# Altium PCB PCB1.PcbDoc
Units mil, origin at the board's own origin, x right, y up, seen from the top; angles counter-clockwise.
Board outline 3050.03 x 2715.03 mil, 2 copper layers (Top Layer, Bottom Layer); 51 components, 33 nets, 120 pads, 4 vias.
Unrouted connection lines stored in the file: 1.
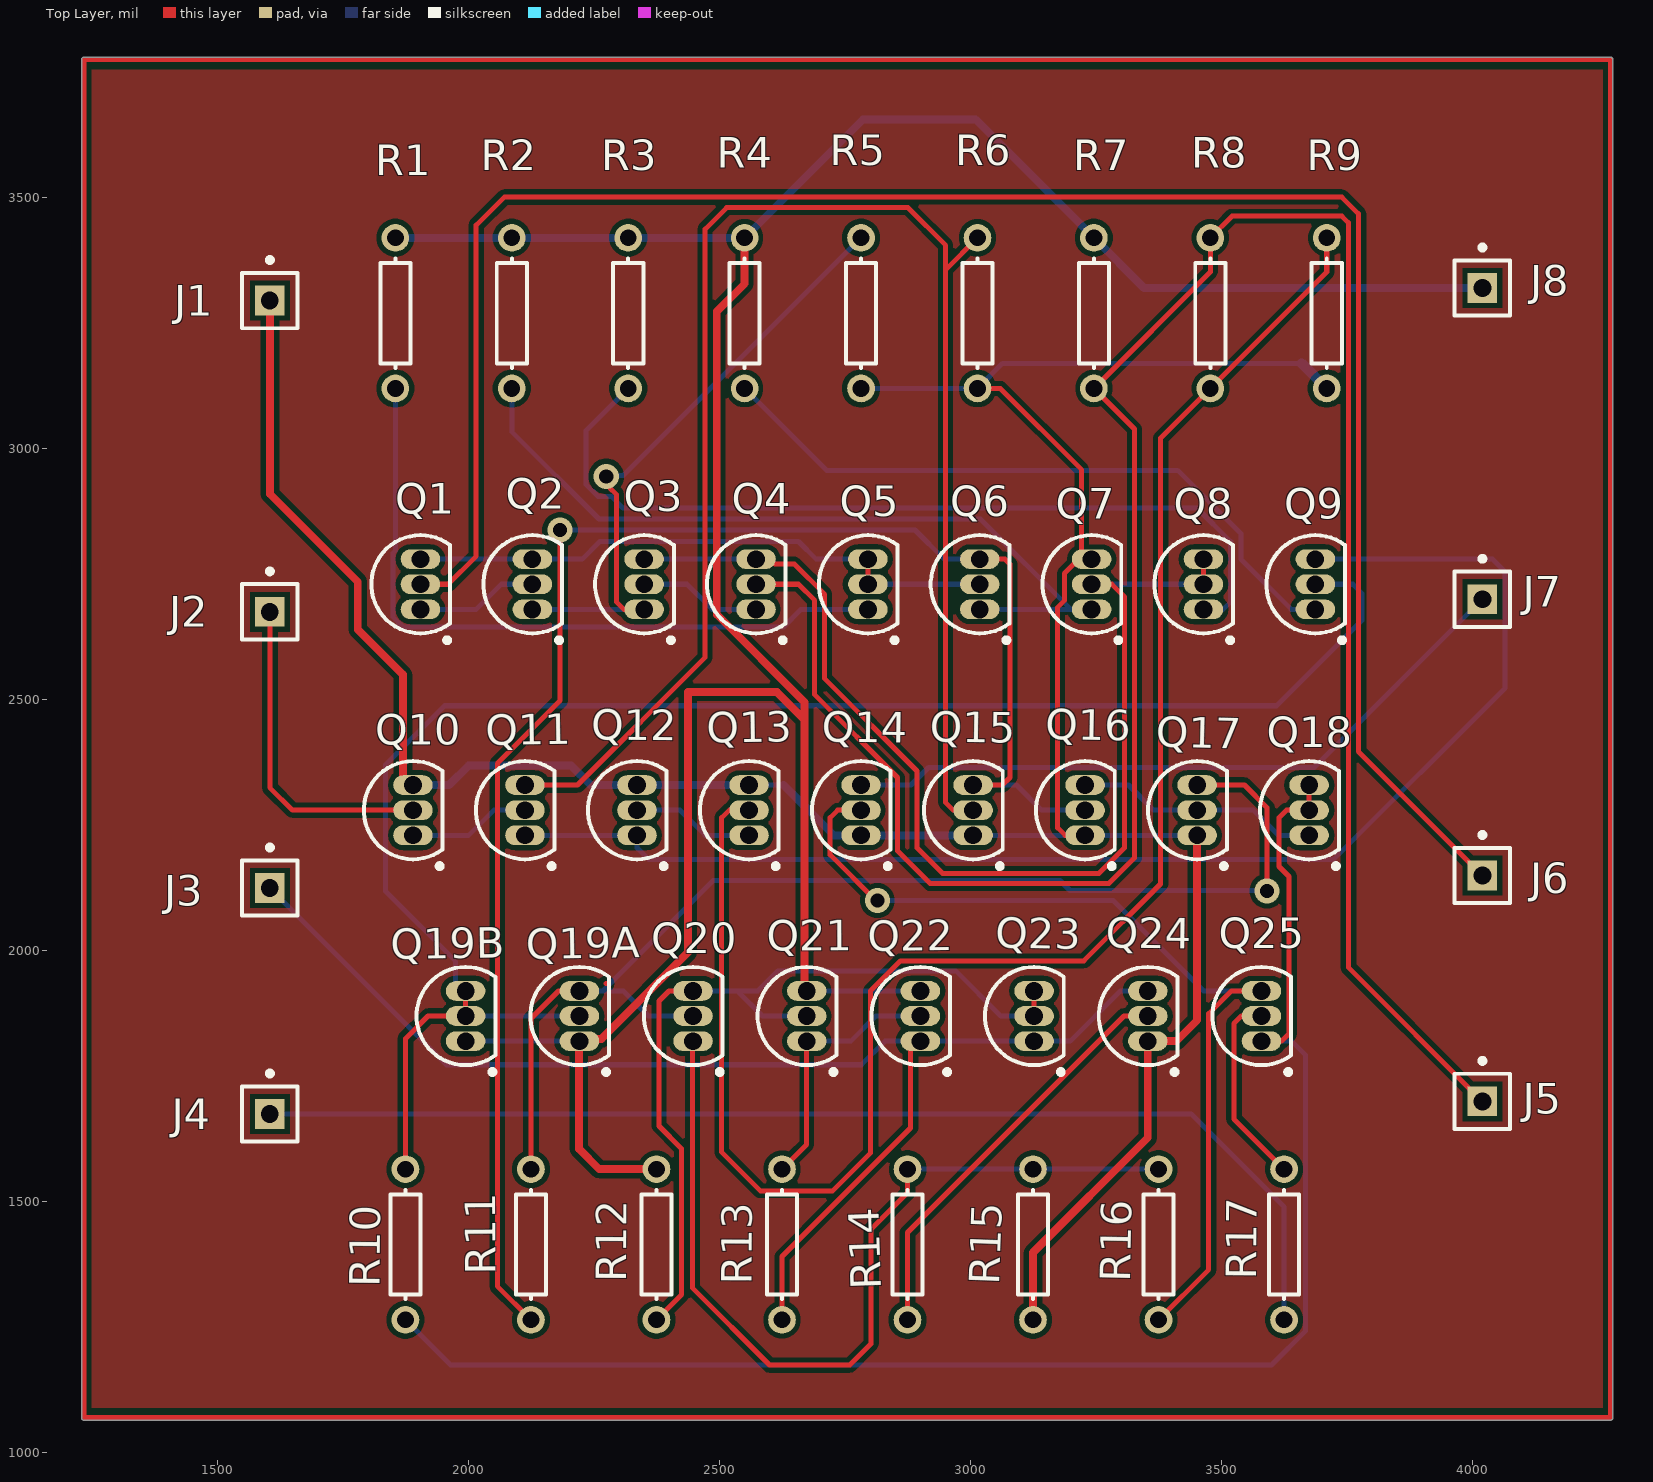
[diagram p0: Top Layer view]
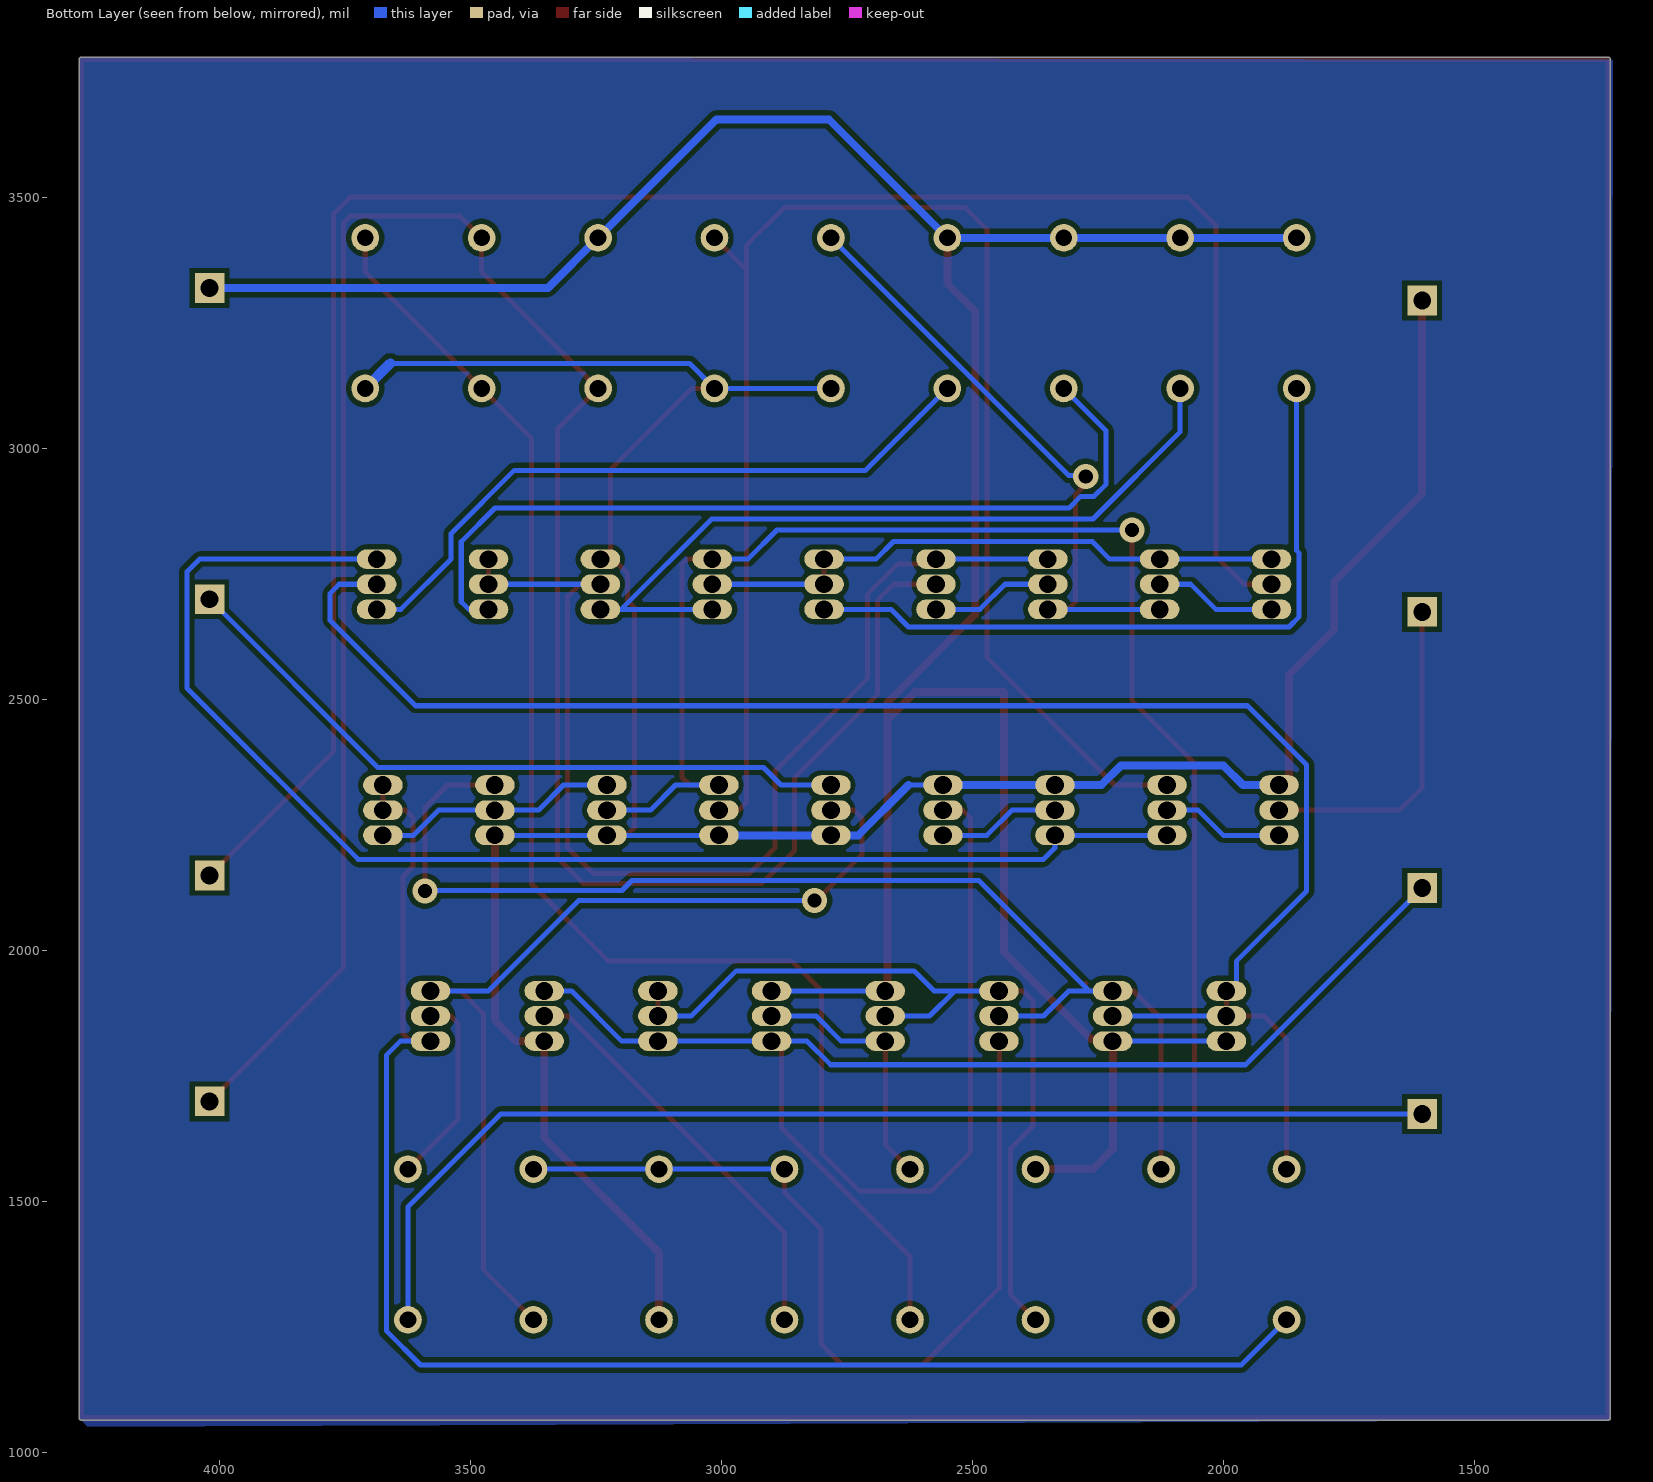
[diagram p1: Bottom Layer view, seen from below]

## Layer stack, top to bottom
Top Solder: solder mask 0.4, Solder Resist, Dk 3.5
Top Layer: signal copper 1.4
Dielectric 1: dielectric 12.6, FR-4, Dk 4.8
Bottom Layer: signal copper 1.4
Bottom Solder: solder mask 0.4, Solder Resist, Dk 3.5

## Board outline
1229.98,1070 ccw(c1235,1070) 1235,1064.98 4275,1064.98 ccw(c4275,1070) 4280.02,1070 4280.02,3775 ccw(c4275,3775) 4275,3780.01 1235,3780.01 ccw(c1235,3775) 1229.98,3775

## Design rules (kind name [scope] priority, off if disabled: settings)
Clearance [All] p1: gap=10 ignorepadtopadclearanceinfootprint=FALSE
PolygonConnect [All] p1: connectstyle=Relief reliefconductorwidth=10 reliefentries=4 polygonreliefangle="90 Angle" airgapwidth=10
RoutingVias [All] p1: holewidth=28 width=50 viastyle="Through Hole" minholewidth=28 minwidth=50 maxholewidth=28 maxwidth=50
SolderMaskExpansion [All] p1: expansion=4 istentingtop=FALSE
Width [All] p1: maxlimit=20 minlimit=10 preferedwidth=10 minimp=50.000000 maximp=50.000000 favimp=50.000000
30 further rules are at their usual default settings.

## Components (designator, comment, footprint, x,y, rotation, side; value= is the part's Value field where it differs from the comment)
J1 "GND" PIN1 1605,3295 r0 top
J2 "Trigger" PIN1 1605,2675 r0 top
J3 "Output" PIN1 1605,2125 r0 top
J4 "Reset" PIN1 1605,1675 r0 top
J5 "Control Voltage" PIN1 4020,1700 r0 top
J6 "Threshold" PIN1 4020,2150 r0 top
J7 "Discharge" PIN1 4020,2700 r0 top
J8 "Vcc" PIN1 4020,3320 r0 top
Q1 "2N3904" TO-92A 1905,2730 r0 top
Q2 "2N3904" TO-92A 2127.78,2730 r0 top
Q3 "2N3904" TO-92A 2350.56,2730 r0 top
Q4 "2N3904" TO-92A 2573.33,2730 r0 top
Q5 "2N3906" TO-92A 2796.11,2730 r0 top
Q6 "2N3906" TO-92A 3018.89,2730 r0 top
Q7 "2N3906" TO-92A 3241.67,2730 r0 top
Q8 "2N3906" TO-92A 3464.44,2730 r0 top
Q9 "2N3906" TO-92A 3687.22,2730 r0 top
Q10 "2N3906" TO-92A 1890,2280 r0 top
Q11 "2N3906" TO-92A 2113.12,2280 r0 top
Q12 "2N3906" TO-92A 2336.25,2280 r0 top
Q13 "2N3906" TO-92A 2559.38,2280 r0 top
Q14 "2N3904" TO-92A 2782.5,2280 r0 top
Q15 "2N3904" TO-92A 3005.62,2280 r0 top
Q16 "2N3904" TO-92A 3228.75,2280 r0 top
Q17 "2N3904" TO-92A 3451.88,2280 r0 top
Q18 "2N3904" TO-92A 3675,2280 r0 top
Q19A "2N3906" TO-92A 2221.43,1870 r0 top
Q19B "2N3906" TO-92A 1995,1870 r0 top
Q20 "2N3904" TO-92A 2447.86,1870 r0 top
Q21 "2N3904" TO-92A 2674.29,1870 r0 top
Q22 "2N3904" TO-92A 2900.71,1870 r0 top
Q23 "2N3906" TO-92A 3127.14,1870 r0 top
Q24 "2N3904" TO-92A 3353.57,1870 r0 top
Q25 "2N3906" TO-92A 3580,1870 r0 top
R1 "Res1" AXIAL-0.3 1855,3270 r90 top value=4.7k
R2 "Res1" AXIAL-0.3 2086.88,3270 r90 top value=820
R3 "Res1" AXIAL-0.3 2318.75,3270 r90 top value=4.7k
R4 "Res1" AXIAL-0.3 2550.62,3270 r90 top value=1k
R5 "Res1" AXIAL-0.3 2782.5,3270 r90 top value=10k
R6 "Res1" AXIAL-0.3 3014.38,3270 r90 top value=100k
R7 "Res1" AXIAL-0.3 3246.25,3270 r90 top value=4.7k
R8 "Res1" AXIAL-0.3 3478.12,3270 r90 top value=4.7k
R9 "Res1" AXIAL-0.3 3710,3270 r90 top value=4.7k
R10 "Res1" AXIAL-0.3 1875,1415 r90 top value=15k
R11 "Res1" AXIAL-0.3 2125,1415 r90 top value=4.7k
R12 "Res1" AXIAL-0.3 2375,1415 r90 top value=6.8k
R13 "Res1" AXIAL-0.3 2625,1415 r90 top value=3.9k
R14 "Res1" AXIAL-0.3 2875,1415 r90 top value=220
R15 "Res1" AXIAL-0.3 3125,1415 r90 top value=4.7k
R16 "Res1" AXIAL-0.3 3375,1415 r90 top value=100
R17 "Res1" AXIAL-0.3 3625,1415 r90 top value=100k

## Footprints (in the part's own frame and the unit in brackets; to place one, negate y for a bottom-side part, rotate by r counter-clockwise, add the part's x,y. Pads: shape width x height; smd on the part's side, far side on the other; paste and mask are expansions set on the pad)
AXIAL-0.3 [mm] "Axial Device, Thru-Hole; 2 Leads; 0.3 in Pin Spacing"
  round 1.4 hole 0.85: 1(-3.81,0) 2(3.81,0)
  silkscreen extent -2.77,-0.76 2.77,0.76
PIN1 [mm] "Connector; Plug"
  rect 1.5x1.5 hole 0.9: 1(0,0)
  silkscreen extent -1.4,-1.4 1.4,2.17
TO-92A [mm] "TO, Flat Index; 3 In-Line, Axial Leads; Body Dia. 4.5mm; Leads 0.51 x 0.48 mm (max)"
  oval 2x1 hole 0.9: 1(0,-1.27) 2(0,0) 3(0,1.27)
  silkscreen extent -2.48,-2.95 1.5,2.48, body extent -2.48,-2.5 1.5,2.5, height 6.86

## Part data
J1 J2 J3 J4 J5 J6 J7 J8: library part Socket, "Socket", LatestRevisionDate=17-Jul-2002, LatestRevisionNote="Re-released for DXP Platform.", Publisher="Altium Limited"
Q1 Q2 Q3 Q4 Q14 Q15 Q16 Q17 Q18 Q20 Q21 Q22 Q24: "NPN General Purpose Amplifier", ComponentLink1Description="Manufacturer Link", ComponentLink1URL=http://www.fairchildsemi.com/, ComponentLink2Description=Datasheet, ComponentLink2URL=http://www.fairchildsemi.com/ds/2N%2F2N3904.pdf, DatasheetVersion=1997, LatestRevisionDate=15-Jan-2003, LatestRevisionNote="PCB Footprint 'BCY-W3/D4.7' replaced", PackageDescription="TO, Flat Index; 3 In-Line, Axial Leads; Body Dia. 4.5mm; Leads 0.51 x 0.48 mm (max)", PackageReference=TO-92A, PackageVersion=Sep-1998, Published=8-Jun-2000, Publisher="Altium Limited"
Q5 Q6 Q7 Q8 Q9 Q10 Q11 Q12 Q13 Q19A Q19B Q23 Q25: "PNP General Purpose Amplifier", ComponentLink1Description="Manufacturer Link", ComponentLink1URL=http://www.fairchildsemi.com/, ComponentLink2Description=Datasheet, ComponentLink2URL=http://www.fairchildsemi.com/ds/2N%2F2N3906.pdf, DatasheetVersion=1997, LatestRevisionDate=15-Jan-2003, LatestRevisionNote="PCB Footprint 'BCY-W3/D4.7' replaced", PackageDescription="TO, Flat Index; 3 In-Line, Axial Leads; Body Dia. 4.5mm; Leads 0.51 x 0.48 mm (max)", PackageReference=TO-92A, PackageVersion=Sep-1998, Published=8-Jun-2000, Publisher="Altium Limited"
R1 R2 R3 R4 R5 R6 R7 R8 R9 R10 R11 R12 R13 R14 R15 R16 R17: "Resistor", LatestRevisionDate=17-Jul-2002, LatestRevisionNote="Re-released for DXP Platform.", PackageDescription="Axial Device, Thru-Hole; 2 Leads; 0.3 in Pin Spacing", PackageReference=AXIAL-0.3, Published=8-Jun-2000, Publisher="Altium Limited"

## Via types
v1: diameter 50, hole 28, Top Layer to Bottom Layer, 4 vias

## Nets (pads, with @x,y where several pads share a name; then routed paths per layer and width w, separated by ;. In a path a pad name is that pad's centre, name@x,y a point inside that pad or via, vN(x,y) a via of type N, cw(c..) or ccw(c..) an arc to the next point about the centre after c; other vN are vias at no path point)
GND: J1.1 Q7.3 Q10.3 Q12.3 Q13.3 Q14.1 Q15.1 Q16.1 Q17.1 Q24.1 R5.1 R6.1 R9.1 R15.1 | length 5924.2
  Top Layer w10: Q10.3@1870,2330 Q10.3 ; R6.1 3060,3120 3222,2958 Q7.3@3222,2780 ; Q7.3@3215.86,2779.12 3214.98,2779.12 3187.3,2751.44 3187.3,2697.3 3174,2684 3174,2245 3189,2230 Q16.1
  Top Layer w15.75: J1.1 1605,2910 1780,2735 1780,2640 1870,2550 Q10.3@1870,2330 ; R15.1 3125,1398.96 3353.57,1627.53 Q24.1 3360,1820 3410,1820 3451.88,1861.88 Q17.1
  Top Layer w20: Q7.3@3215.86,2779.12 Q7.3@3215.86,2780 ; Q7.3@3216.74,2780 Q7.3
  Bottom Layer w10: Q13.3 2628,2330 ; R5.1 R6.1 3064.38,3170 3660,3170 ; Q15.1 Q16.1 Q17.1
  Bottom Layer w15.75: Q10.3 1962,2330 2001,2369 2205,2369 2244,2330 Q12.3 Q13.3 ; 2628,2330 2728,2230 Q14.1 Q15.1
  Bottom Layer w20: 3660,3170 R9.1
NetJ2_1: J2.1 Q10.2 | length 653.6
  Top Layer w10: J2.1 1605,2325 1650,2280 Q10.2
NetJ3_1: J3.1 Q22.1 Q23.1 Q24.3 R13.1 | length 2636
  Top Layer w10: R13.1 2625,1391 2881,1647 2881,1820 Q22.1
  Bottom Layer w10: J3.1 1957,1773 2783,1773 2830,1820 Q22.1 Q23.1 3199,1820 3299,1920 Q24.3
NetJ4_1: J4.1 R17.1 | length 2321.6
  Bottom Layer w10: J4.1 3440,1675 3625,1490 R17.1
NetJ5_1: J5.1 Q4.2 R7.1 R8.2 | length 4740.5
  Top Layer w10: Q4.2 2658,2730 2690,2698 2690,2510 2855,2345 2855,2199 2920,2134 3276,2134 3327,2185 3327,3039.25 R7.1 3478.13,3351.88 R8.2 3521.13,3463 3740,3463 3753,3450 3753,1967 J5.1
NetJ6_1: J6.1 Q1.2 | length 4007.4
  Top Layer w10: Q1.2 1960,2730 2016,2786 2016,3445 2072,3501 3740,3501 3773,3468 3773,2397 J6.1
NetJ7_1: J7.1 Q14.3 | length 1390.8
  Bottom Layer w10: Q14.3 2882,2330 2917,2365 3685,2365 J7.1
NetJ8_1: J8.1 Q19A.1 Q19B.1 Q21.3 Q22.3 R1.2 R2.2 R3.2 R4.2 R7.2 R12.2 | length 5904.4
  Top Layer w10: Q19A.1@2221,1820 Q19A.1 Q19A.1@2226.01,1824.58 ; 2275,1935.17 2275.8,1934.37 ; Q21.3@2670,1920 Q21.3
  Top Layer w15.75: Q19A.1@2221,1820 2221,1605 2261,1565 R12.2 ; Q19A.1@2226.01,1824.58 2265.58,1824.58 2438,1997 2438,2515 2615,2515 2670,2460 ; R4.2 2550.63,3328.63 2495,3273 2495,2670 2670,2495 2670,2460 ; Q21.3@2670,1920 2670,2460
  Bottom Layer w10: Q19B.1 Q19A.1 ; Q21.3 Q22.3
  Bottom Layer w15.75: R1.2 R2.2 R3.2 R4.2 2786.63,3656 3010.25,3656 R7.2 3346.25,3320 J8.1
NetQ1_1: Q1.1 Q2.2 | length 243.5
  Bottom Layer w10: Q1.1 2016,2680 2066,2730 Q2.2
NetQ1_3: Q1.3 Q2.3 Q5.2 Q5.3 Q6.2 | length 1192.9
  Top Layer w10: Q5.2 Q5.3
  Bottom Layer w10: Q1.3 Q2.3 2227,2780 2262,2815 2658,2815 2693,2780 Q5.3 ; Q5.2 Q6.2
NetQ2_1: Q2.1 Q3.1 R5.2 | length 1247.1
  Top Layer w10: v1(2275,2945) 2282.65,2937.35 2282.65,2921.49 2295,2909.14 2295,2695 2310,2680 Q3.1
  Bottom Layer w10: Q2.1 Q3.1 ; v1(2275,2945) 2276.64,2946.64 2309.14,2946.64 R5.2
NetQ3_2: Q3.2 Q4.1 | length 243.5
  Bottom Layer w10: Q3.2 2436,2730 2486,2680 Q4.1
NetQ3_3: Q3.3 Q4.3 Q7.2 Q8.2 Q8.3 | length 2273.4
  Top Layer w10: Q4.3 2600.97,2780 2610.97,2770 2650,2770 2710,2710 2710,2542 2894,2358 2894,2205 2945,2154 3256,2154 3307,2205 3307,2705 3282,2730 Q7.2 ; Q8.2 Q8.3
  Bottom Layer w10: Q3.3 Q4.3 ; Q7.2 Q8.2
NetQ5_1: Q5.1 R1.1 | length 1426
  Bottom Layer w10: R1.1 1855,2797 1850,2792 1850,2665 1870,2645 2628,2645 2663,2680 Q5.1
NetQ6_1: Q6.1 Q7.1 R2.1 | length 1568.8
  Bottom Layer w10: R2.1 2086.88,3033.57 2260.44,2860 3020,2860 3200,2680 ; Q6.1 3200,2680 ; Q7.1 3200,2680
NetQ6_3: Q6.3 Q15.3 Q16.2 R11.1 | length 3325.1
  Top Layer w10: R11.1 2058,1332 2058,2373 2183,2498 v1(2183,2838) ; Q15.3 3064,2330 3079,2345 3079,2770 3069,2780 Q6.3
  Bottom Layer w10: v1(2183,2838) 2890,2838 2948,2780 Q6.3 ; Q15.3 3092,2330 3142,2280 Q16.2
NetQ8_1: Q8.1 R3.1 | length 1737.5
  Bottom Layer w10: R3.1 2235,3036.25 2235,2928.43 2258.43,2905 2285,2905 2308,2882 3451.5,2882 3518.82,2814.69 3518.82,2695 3503.82,2680 Q8.1
NetQ9_1: Q9.1 R4.1 | length 1348.7
  Bottom Layer w10: R4.1 2713.63,2957 3413,2957 3538.82,2831.18 3538.82,2780.18 3639,2680 Q9.1
NetQ9_2: Q9.2 Q19A.2 Q19B.2 Q19B.3 R10.2 | length 3421.6
  Top Layer w10: R10.2 1875,1825 1920,1870 Q19B.2 Q19B.3
  Bottom Layer w10: Q19B.2 Q19A.2 ; Q19B.3 1975,1920 1975,1979 1835,2119 1835,2370 1953,2488 3610,2488 3780,2658 3780,2712 3762,2730 Q9.2
NetQ9_3: Q9.3 Q11.1 Q12.1 | length 2747.8
  Bottom Layer w10: Q11.1 Q12.1 2336.25,2205 2359.25,2182 3724,2182 4065,2523 4065,2755 4040,2780 Q9.3
NetQ10_1: Q10.1 Q11.2 | length 243.8
  Bottom Layer w10: Q10.1 2001,2230 2051,2280 Q11.2
NetQ11_3: Q11.3 Q15.2 R6.2 | length 3105.2
  Top Layer w10: Q11.3 2217.64,2330 2472.13,2584.48 2472.13,3437.13 2515,3480 2876,3480 2951,3405 2951,3356.62 ; Q15.2 2966,2280 2951,2295 2951,3356.62 ; R6.2 2951,3356.62
NetQ12_2: Q12.2 Q13.1 | length 243.8
  Bottom Layer w10: Q12.2 2422,2280 2472,2230 Q13.1
NetQ13_2: Q13.2 R8.1 R9.2 | length 3498.9
  Top Layer w10: Q13.2 2520,2280 2505,2265 2505,1599 2582,1522 2726,1522 2801,1597 2801,1920 2861,1980 3226,1980 3379,2133 3379,3020.87 R8.1 3710,3351.87 R9.2
NetQ14_2: Q14.2 Q25.3 R16.1 | length 1888
  Top Layer w10: Q14.2 2736,2280 2721,2265 2721,2191 2812,2100 v1(2815,2100) ; R16.1 3474.75,1364.75 3474.75,1874.75 3520,1920 Q25.3
  Bottom Layer w10: v1(2815,2100) 3285,2100 3465,1920 Q25.3
NetQ16_3: Q16.3 Q17.2 Q18.1 | length 487.7
  Bottom Layer w10: Q16.3 3315,2330 3365,2280 Q17.2 3564,2280 3614,2230 Q18.1
NetQ17_3: Q17.3 Q19A.3 Q20.2 R11.2 | length 2412.9
  Top Layer w10: R11.2 2125,1865 2180,1920 Q19A.3 ; Q17.3 3546,2330 3591,2285 v1(3591,2119)
  Bottom Layer w10: Q19A.3 2268,1920 ; Q20.2 2359,1870 2309,1920 2268,1920 ; v1(3591,2119) 3590,2120 3198.8,2120 3178.8,2140 2488,2140 2268,1920
NetQ18_2: Q18.2 Q18.3 Q25.1 R10.1 | length 3122.8
  Top Layer w10: Q25.1 3620,1820 3635,1835 3635,2148 3615,2168 3615,2265 3630,2280 Q18.2 Q18.3
  Bottom Layer w10: R10.1 1965,1175 3600,1175 3668,1243 3668,1792 3640,1820 Q25.1
NetQ20_1: Q20.1 R14.2 R15.2 R16.2 | length 1806.9
  Top Layer w10: Q20.1 2447,1820 2447,1328 2600,1175 2760,1175 2802,1217 2802,1445 2875,1518 R14.2
  Bottom Layer w10: R14.2 R15.2 R16.2
NetQ20_3: Q20.3 Q21.2 Q23.2 Q23.3 R12.1 | length 1692.7
  Top Layer w10: R12.1 2425,1315 2425,1606 2379.92,1651.08 2379.92,1899.92 2400,1920 Q20.3 ; Q23.2 Q23.3
  Bottom Layer w10: Q20.3 2536,1920 ; Q21.2 2586,1870 2536,1920 ; Q23.2 3061,1870 2971,1960 2617,1960 2577,1920 2536,1920
NetQ21_1: Q21.1 Q22.2 R13.2 | length 522.6
  Top Layer w10: R13.2 2674.29,1614.29 Q21.1
  Bottom Layer w10: Q21.1 2762,1820 2812,1870 Q22.2
NetQ24_2: Q24.2 R14.1 | length 831.1
  Top Layer w10: R14.1 2875,1439 3306,1870 Q24.2
NetQ25_2: Q25.2 R17.2 | length 392.6
  Top Layer w10: Q25.2 3540,1870 3525,1855 3525,1665 R17.2
copper on no net: | length 11490
  Top Layer w10: 1235,1070 4275,1070 4275,3775 1235,3775 1235,1070

## Polygon pours and split planes (outlines as drawn)
no net on Bottom Layer "NONET_L02_P001" (solid, pour order 1): 1229.98,3775 1224.97,3780.01 1229.98,1064.98 4262.51,1052.49 4280.02,1070 4280.02,3780.02
no net on Top Layer "NONET_L01_P000" (solid, pour order 0): 1245,3755 4260,3755 4260,1090 1245,1090